# Altium PCB 3Wheel_MotorDrivers_Encoders.PcbDoc
Units mil, origin at the board's own origin, x right, y up, seen from the top; angles counter-clockwise.
Board outline 2760.61 x 2385 mil, 2 copper layers (Top Layer, Bottom Layer); 35 components, 40 nets, 155 pads, 68 vias.
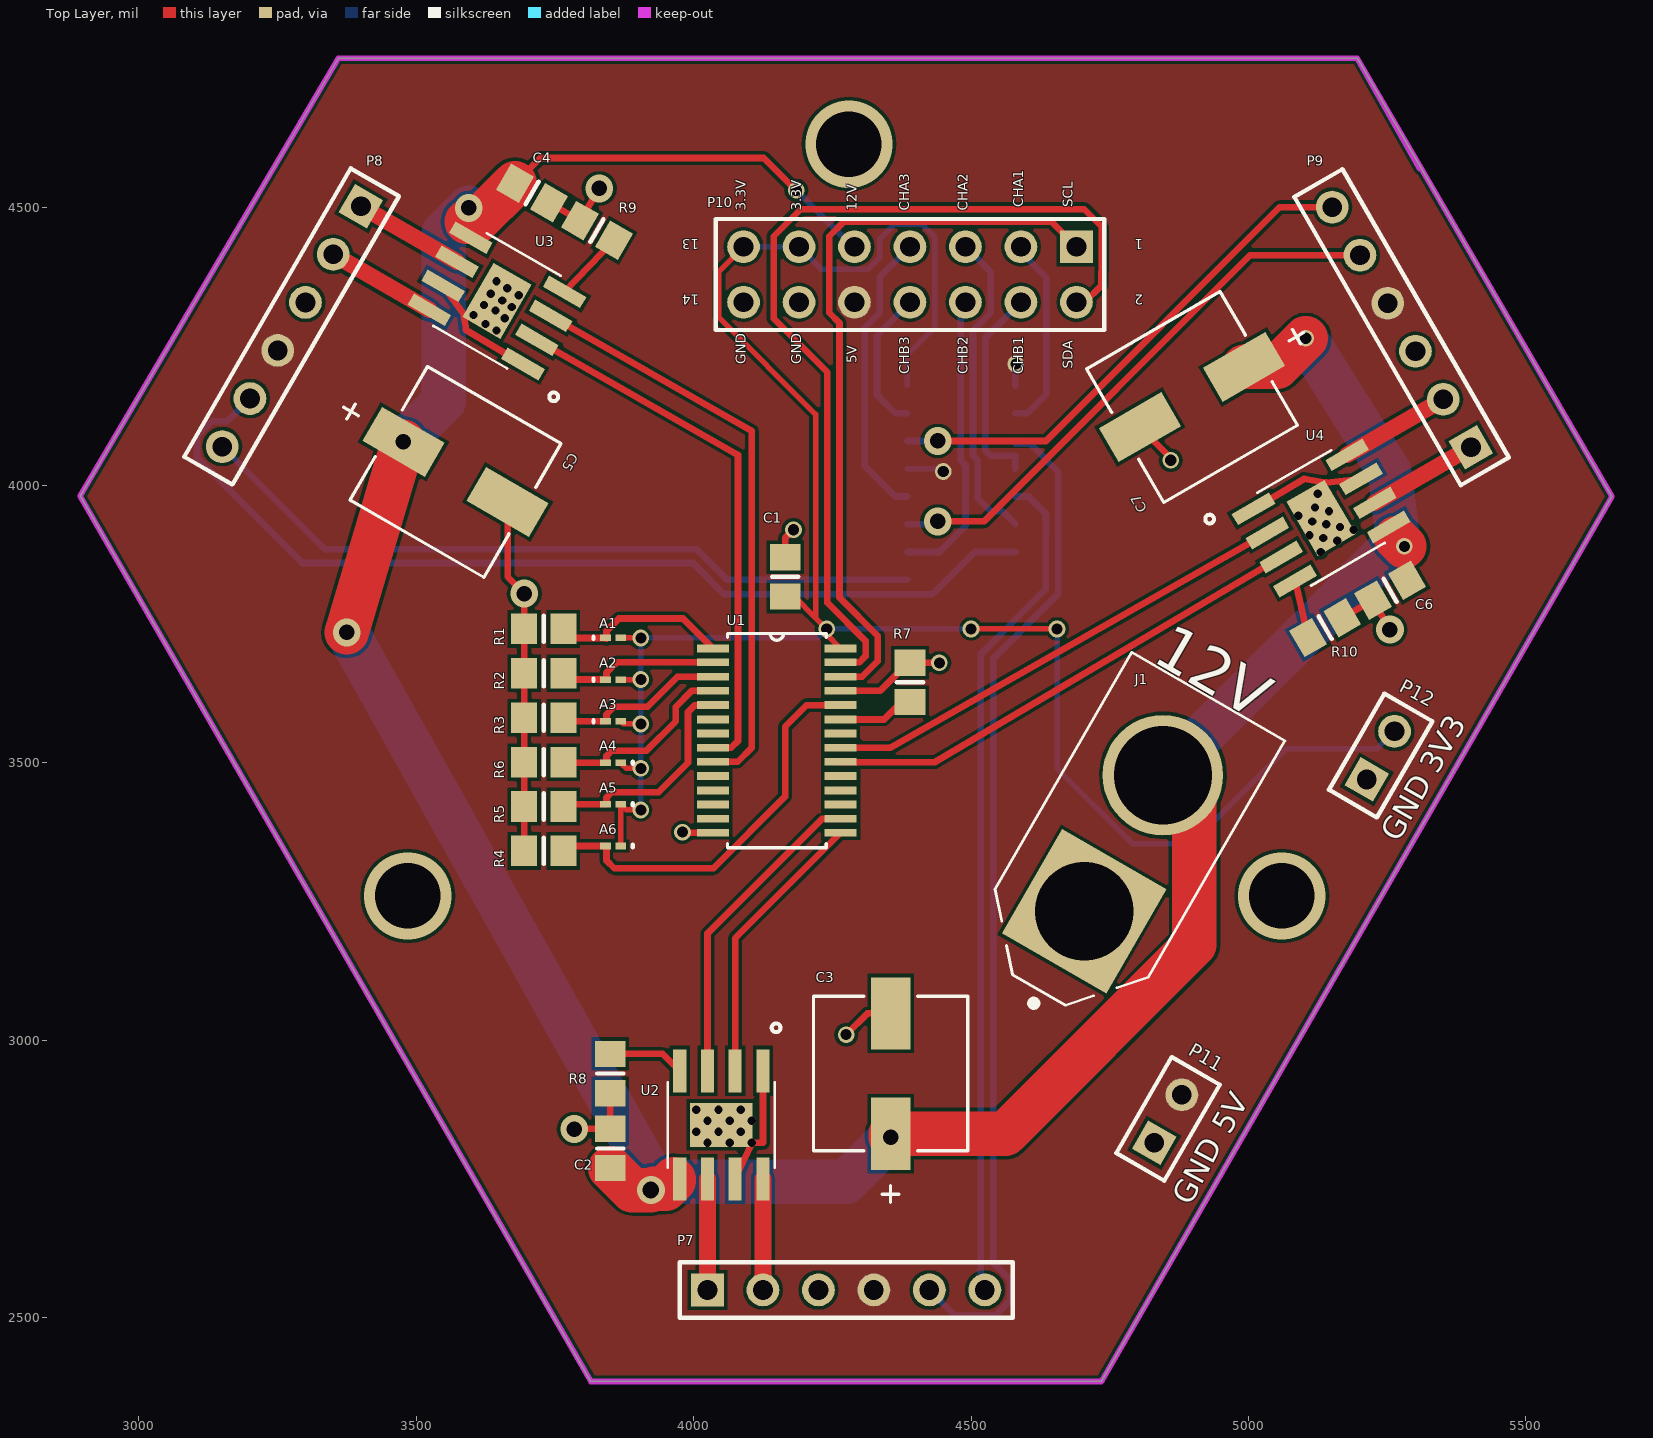
[diagram p0: Top Layer view]
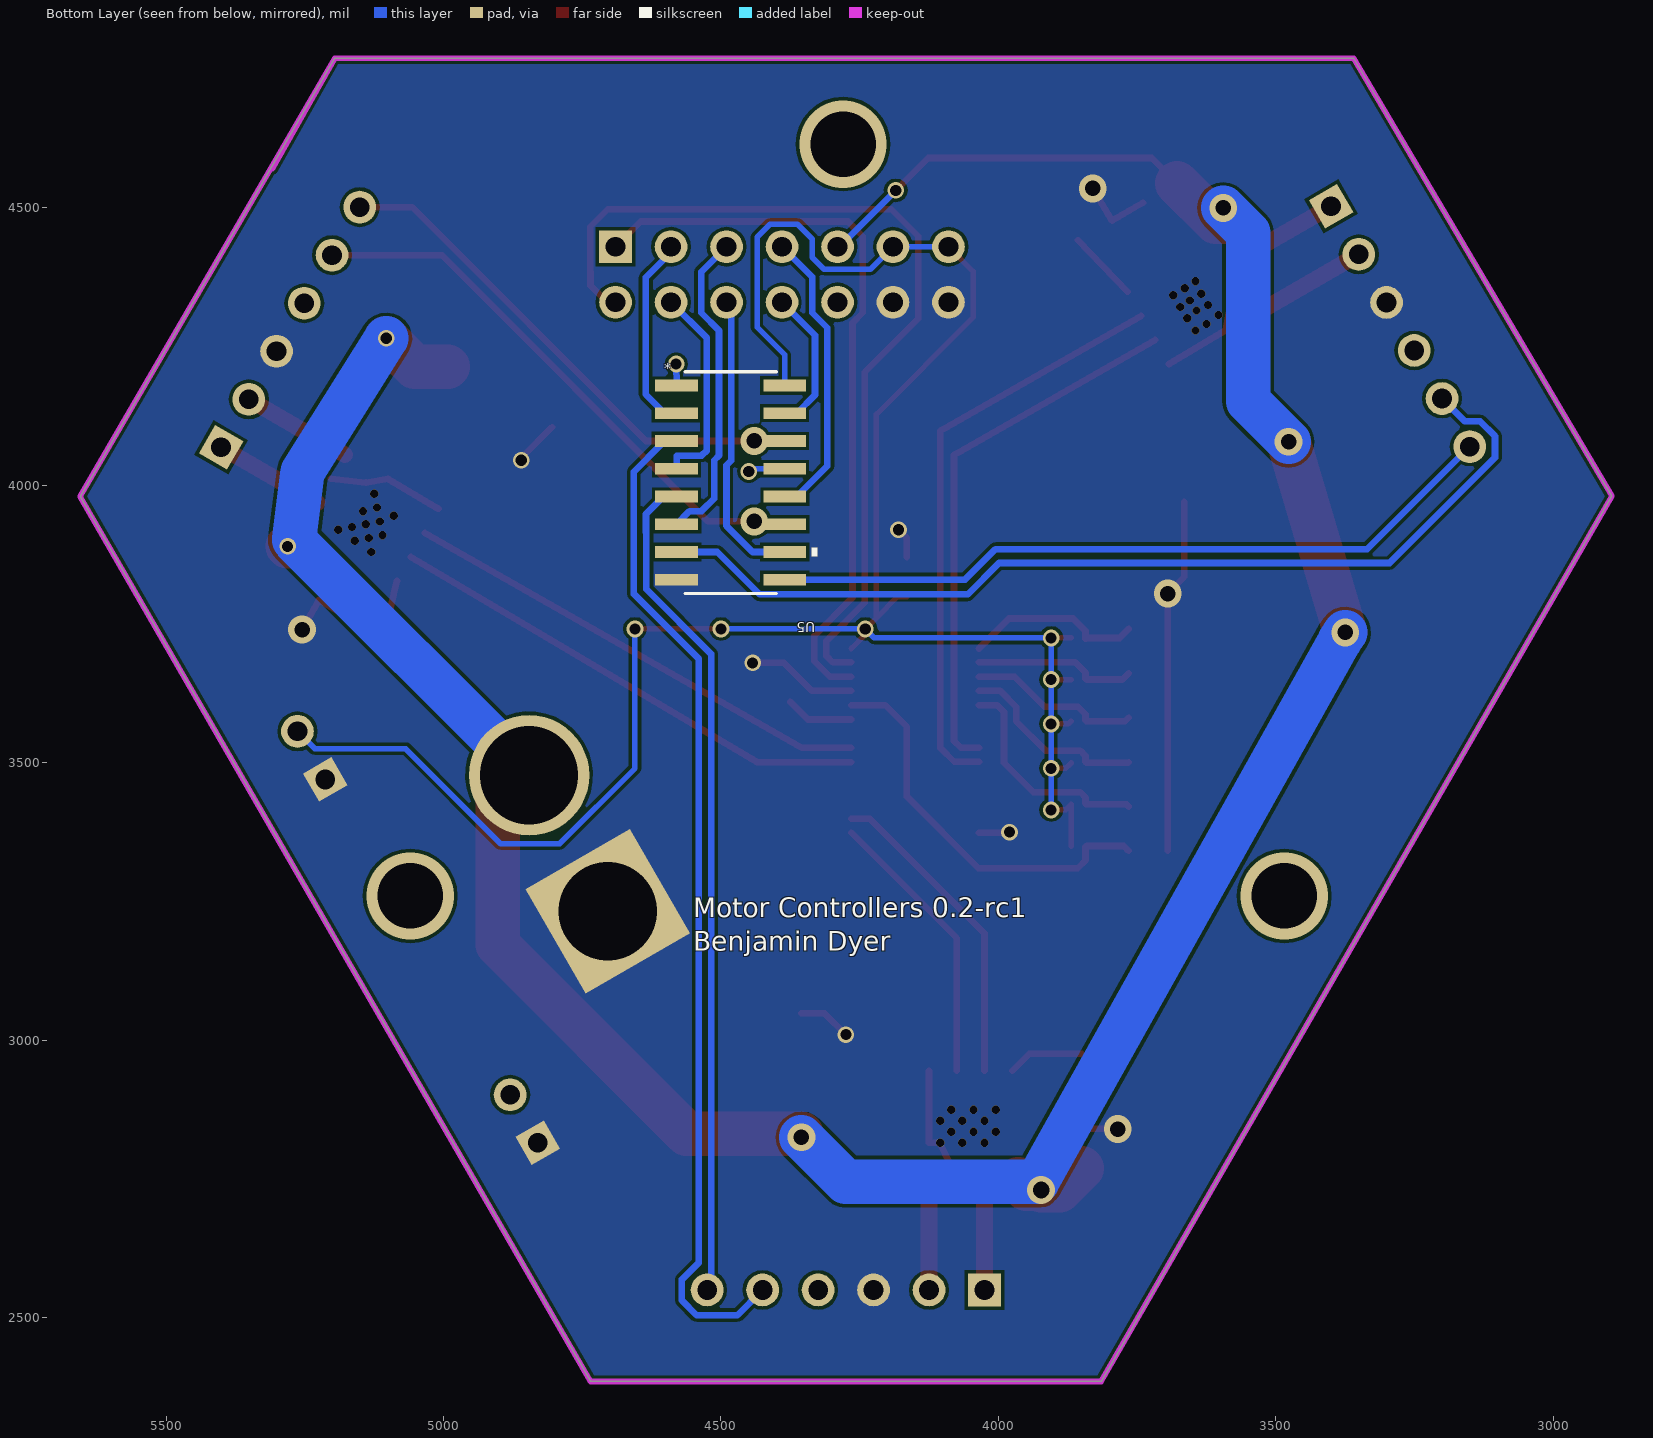
[diagram p1: Bottom Layer view, seen from below]

## Layer stack, top to bottom
Top Solder: solder mask 0.4, Solder Resist, Dk 3.5
Top Layer: signal copper 1.4
Dielectric 1: dielectric 12.6, FR-4, Dk 4.8
Bottom Layer: signal copper 1.4
Bottom Solder: solder mask 0.4, Solder Resist, Dk 3.5

## Board outline
3815,2385 2894.39,3980.73 3360,4770 5195.9,4770 5655,3980 4735,2385

## Design rules (kind name [scope] priority, off if disabled: settings)
Clearance [All] p1: gap=6 ignorepadtopadclearanceinfootprint=FALSE
ComponentClearance [All] p1: gap=0 collisioncheckmode=3 verticalgap=0 showdistances=FALSE
PolygonConnect [All] p1: connectstyle=Direct reliefconductorwidth=10 reliefentries=4 polygonreliefangle="90 Angle" airgapwidth=10
RoutingVias [All] p1: holewidth=15 width=25 viastyle="Through Hole" minholewidth=15 minwidth=15 maxholewidth=50 maxwidth=50
SolderMaskExpansion [All] p1: expansion=4
Width [All] p1: maxlimit=80 minlimit=6 preferedwidth=10 minimp=50.000000 maximp=50.000000 favimp=50.000000
29 further rules are at their usual default settings.

## Components (designator, comment, footprint, x,y, rotation, side; value= is the part's Value field where it differs from the comment)
A1 "Bridge" 0603 3855,3725 r0 top
A2 "Bridge" 0603 3855,3650 r0 top
A3 "Bridge" 0603 3855,3575 r0 top
A4 "Bridge" 0603 3855,3500 r180 top
A5 "Bridge" 0603 3855,3425 r180 top
A6 "Bridge" 0603 3855,3350 r180 top
C1 "Cap" 6-0805_N 4165,3835 r270 top value=10uF
C2 "0.1uF" 6-0805_N 3850,2805 r270 top
C3 "47uF" PCAP_6.3x7.7-ELE 4355,2940 r90 top value=Value
C4 "0.1uF" 6-0805_N 3708.89,4526.9 r150 top
C5 "47uF" PCAP_6.3x7.7-ELE 3571.04,4024.25 r330 top value=Value
C6 "0.1uF" 6-0805_N 5255.1,3810.99 r30 top
C7 "47uF" PCAP_6.3x7.7-ELE 4898.19,4159.18 r210 top value=Value
J1 "XT60-M" *AMASS_XT60-M 4775,3355 r60 top
P7 "Header 6" HDR1X6 4025,2550 r0 top
P8 "Header 6" HDR1X6 3400.55,4502.85 r240 top
P9 "Header 6" HDR1X6 5400.94,4068.39 r120 top
P10 "Header 7X2" HDR2X7 4690,4430 r180 top
P11 "Header 2" HDR1X2 4830,2815 r60 top
P12 "Header 2" HDR1X2 5213.2,3470 r60 top
R1 "10K" 6-0805_N 3730,3741.2 r0 top
R2 "10K" 6-0805_N 3730,3661.2 r0 top
R3 "10K" 6-0805_N 3730,3581.2 r0 top
R4 "10K" 6-0805_N 3730,3341.2 r0 top
R5 "10K" 6-0805_N 3730,3421.2 r0 top
R6 "10K" 6-0805_N 3730,3501.2 r0 top
R7 "Res1" 6-0805_N 4390,3645 r270 top value=10K
R8 "Res1" 6-0805_N 3850,2940 r90 top value=33K
R9 "Res1" 6-0805_N 3825.8,4459.4 r330 top value=33K
R10 "Res1" 6-0805_N 5138.19,3743.49 r210 top value=33K
U1 "PCA9685PW/Q900,118" *SOP65P640X110-28N 4150,3540 r0 top
U2 "DRV8871DDAR" *SOIC127P600X170-8N 4050,2847.44 r270 top
U3 "DRV8871DDAR" *SOIC127P600X170-8N 3645.64,4332.48 r150 top
U4 "DRV8871DDAR" *SOIC127P600X170-8N 5130.84,3941.32 r30 top
U5 "Part Number: MC14504BDR2G" SOIC-16 4482.5,4005 r180 bottom value=Value

## Footprints (in the part's own frame and the unit in brackets; to place one, negate y for a bottom-side part, rotate by r counter-clockwise, add the part's x,y. Pads: shape width x height; smd on the part's side, far side on the other; paste and mask are expansions set on the pad)
6-0805_N [mm] "Chip Resistor, Body 2.0x1.2mm, IPC Medium Density"
  rect 1.2x1.4 smd: 1(-0.9,0) 2(0.9,0)
  silkscreen extent 0,-0.6 0,0.6, body extent -1.07,-0.7 1.07,0.7, height 0.7
0603 [mm] "Chip Inductor, Body 0.6x0.3mm, IPC High Density"
  rect 0.5x0.3 smd: 1(-0.35,0) 2(0.35,0)
  silkscreen extent -0.9,-0.05 -0.9,0.05, body extent -0.33,-0.18 0.33,0.18, height 0.55
*AMASS_XT60-M [mm]
  rect 5.516x5.516 hole 4.5: 1(-3.6,0)
  round 5.516 hole 4.5: 2(3.6,0)
  silkscreen extent -8.55,-4.05 7.75,4.05
*SOIC127P600X170-8N [mm]
  rect 1.97x0.6 smd: 1(-2.475,1.905) 2(-2.475,0.635) 3(-2.475,-0.635) 4(-2.475,-1.905) 5(2.475,-1.905) 6(2.475,-0.635) 7(2.475,0.635) 8(2.475,1.905)
  rect 2.02x2.87 smd: 9(0,0)
  silkscreen extent -4.64,-2.45 1.95,2.7
*SOP65P640X110-28N [mil]
  rect 58x14 smd: 1(-115,166) 2(-115,141) 3(-115,115) 4(-115,90) 5(-115,64) 6(-115,38) 7(-115,13) 8(-115,-13) 9(-115,-38) 10(-115,-64) 11(-115,-90) 12(-115,-115) 13(-115,-141) 14(-115,-166) 15(115,-166) 16(115,-141) 17(115,-115) 18(115,-90) 19(115,-64) 20(115,-38) 21(115,-13) 22(115,13) 23(115,38) 24(115,64) 25(115,90) 26(115,115) 27(115,141) 28(115,166)
  silkscreen extent -89,-193 89,193
HDR1X2 [mm] "Connector; Header; 2 Position"
  rect 1.5x1.5 hole 0.9: 1(0,0)
  round 1.5 hole 0.9: 2(2.54,0)
  silkscreen extent -1.27,-1.27 3.81,1.27
HDR1X6 [mm] "Connector; Header; 6 Position"
  rect 1.5x1.5 hole 0.9: 1(0,0)
  round 1.5 hole 0.9: 2(2.54,0) 3(5.08,0) 4(7.62,0) 5(10.16,0) 6(12.7,0)
  silkscreen extent -1.27,-1.27 13.97,1.27
HDR2X7 [mm] "Connector; Header; 7x2 Position"
  rect 1.5x1.5 hole 0.9: 1(0,0)
  round 1.5 hole 0.9: 2(0,2.54) 3(2.54,0) 4(2.54,2.54) 5(5.08,0) 6(5.08,2.54) 7(7.62,0) 8(7.62,2.54) 9(10.16,0) 10(10.16,2.54) 11(12.7,0) 12(12.7,2.54) 13(15.24,0) 14(15.24,2.54)
  silkscreen extent -1.27,-1.27 16.51,3.81
PCAP_6.3x7.7-ELE [mil]
  rect 130x71 smd paste+0 mask+0: 1(-108.5,0) 2(108.5,0)
  silkscreen extent -232,-139 139,139, body extent 0,0 10,10, height 10
SOIC-16 [mil]
  rect 77x21 smd: 1(-97.5,175) 2(-97.5,125) 3(-97.5,75) 4(-97.5,25) 5(-97.5,-25) 6(-97.5,-75) 7(-97.5,-125) 8(-97.5,-175) 9(97.5,-175) 10(97.5,-125) 11(97.5,-75) 12(97.5,-25) 13(97.5,25) 14(97.5,75) 15(97.5,125) 16(97.5,175)
  silkscreen extent -82,-200 156,200, body extent 0,0 10,10, height 10

## Part data
A1 A2 A3 A4 A5 A6: library part "Header 2", "Header, 2-Pin", LatestRevisionDate=17-Jul-2002, LatestRevisionNote="Re-released for DXP Platform.", Publisher="Altium Limited"
C1: "Capacitor", LatestRevisionDate=17-Jul-2002, LatestRevisionNote="Re-released for DXP Platform.", PackageDescription="Radial Cap, Thru-Hole; 2 Leads; 0.3 in Pin Spacing", PackageReference=RAD-0.3, Published=8-Jun-2000, Publisher="Altium Limited"
C2 C4 C6: library part Cap, "Capacitor", LatestRevisionDate=17-Jul-2002, LatestRevisionNote="Re-released for DXP Platform.", PackageDescription="Radial Cap, Thru-Hole; 2 Leads; 0.3 in Pin Spacing", PackageReference=RAD-0.3, Published=8-Jun-2000, Publisher="Altium Limited"
C3 C5 C7: library part UWT1H470MCL1GS, "No Description Available", Built_By=EMA_UL_Team, Copyright="Copyright (C) 2018 Accelerated Designs. All rights reserved", Manufacturer_Part_Number=UWT1H470MCL1GS, RefDes=RefDes, Type=DEV, Vendor=Nichicon
J1: "Plug; DC supply; XT60; male; PIN: 2; for cable; soldered; 30A; 500V", Package="Package Analog Devices", Availability=Unavailable, MF=AMASS, MP=XT60-M, Price=None, SnapEDA_Link=https://www.snapeda.com/parts/XT60-M/AMASS/view-part/2883912/?ref=snap
P7 P8 P9: "Header, 6-Pin", LatestRevisionDate=17-Jul-2002, LatestRevisionNote="Re-released for DXP Platform.", Publisher="Altium Limited"
P10: "Header, 7-Pin, Dual row", LatestRevisionDate=17-Jul-2002, LatestRevisionNote="Re-released for DXP Platform.", Publisher="Altium Limited"
P11 P12: "Header, 2-Pin", LatestRevisionDate=17-Jul-2002, LatestRevisionNote="Re-released for DXP Platform.", Publisher="Altium Limited"
R1 R2 R3 R4 R5 R6: library part Res1, "Resistor", LatestRevisionDate=17-Jul-2002, LatestRevisionNote="Re-released for DXP Platform.", PackageDescription="Axial Device, Thru-Hole; 2 Leads; 0.3 in Pin Spacing", PackageReference=AXIAL-0.3, Published=8-Jun-2000, Publisher="Altium Limited"
R7 R8 R9 R10: "Resistor", LatestRevisionDate=17-Jul-2002, LatestRevisionNote="Re-released for DXP Platform.", PackageDescription="Axial Device, Thru-Hole; 2 Leads; 0.3 in Pin Spacing", PackageReference=AXIAL-0.3, Published=8-Jun-2000, Publisher="Altium Limited"
U1: "LED Driver IC 16 Output Linear PWM Dimming 25mA 28-TSSOP", Package="TSSOP-28 NXP Semiconductors", Digi-Key_Part_Number=568-5931-1-ND, Digi-Key_Purchase_URL=https://www.digikey.com/product-detail/en/nxp-usa-inc/PCA9685PW-Q900,118/568-5931-1-ND/2531218?utm_source=snapeda&utm_medium=aggregator&utm_campaign=symbol, MF="NXP USA", MP=PCA9685PW/Q900,118, SnapEDA_Link=https://www.snapeda.com/parts/PCA9685PW/Q900%2C118/NXP%20USA%20Inc./view-part/380795/?ref=snap
U2 U3 U4: "Unipolar Motor Driver NMOS PWM 8-SO PowerPad", Package="SO-8 Texas Instruments", Digi-Key_Part_Number=296-43024-1-ND, Digi-Key_Purchase_URL=https://www.digikey.com/product-detail/en/texas-instruments/DRV8871DDAR/296-43024-1-ND/5722182?utm_source=snapeda&utm_medium=aggregator&utm_campaign=symbol, MF="Texas Instruments", MP=DRV8871DDAR, SnapEDA_Link=https://www.snapeda.com/parts/DRV8871DDAR/Texas%20Instruments/view-part/492651/?ref=snap
U5: library part MC14504BDR2G, "No Description Available", Copyright="Copyright (C) 2016 Accelerated Designs. All rights reserved", Manufacturer_Part_Number=MC14504BDR2G, RefDes=RefDes, Type=DEV, Vendor="ON Semiconductor"

## Via types
v1: diameter 15, hole 15, Top Layer to Bottom Layer, tented both sides, 36 vias
v2: diameter 30, hole 20, Top Layer to Bottom Layer, tented both sides, 18 vias
v3: diameter 50, hole 28, Top Layer to Bottom Layer, tented both sides, 10 vias
v4: diameter 157.48, hole 118.11, Top Layer to Bottom Layer, 3 vias
v5: diameter 50, hole 30, Top Layer to Bottom Layer, tented both sides, 1 vias

## Nets (pads, with @x,y where several pads share a name; then routed paths per layer and width w, separated by ;. In a path a pad name is that pad's centre, name@x,y a point inside that pad or via, vN(x,y) a via of type N, cw(c..) or ccw(c..) an arc to the next point about the centre after c; other vN are vias at no path point)
3V3: A1.2 A2.2 A3.2 A4.1 A5.1 A6.1 C1.2 P10.11 P10.13 P12.2 U1.28 U5.16 | length 3949
  Top Layer w10: A6.1 A5.1 3878.78,3415 v2(3905,3415) ; A4.1 3878.78,3490 v2(3905,3490) ; A3.2 3873.78,3570 v2(3905,3570) ; A2.2 v2(3905,3650) ; A1.2 v2(3905,3725) ; P10.13 4045.47,4385.47 4045.47,4302.53 4220,4128 4220,3761.2 ; C1.2 4181.64,3799.57 4220,3761.2 ; U1.28 4240,3731 v2(4240,3741.2) 4220,3761.2 ; v2(4500,3741.2) v2(4655,3741.2)
  Bottom Layer w10: v2(3905,3415) v2(3905,3490) v2(3905,3570) v2(3905,3650) v2(3905,3725) 4223.8,3725 v2(4240,3741.2) v2(4500,3741.2) ; P10.13 P10.11 4230.53,4389.47 4314.09,4389.47 4335.53,4410.91 4335.53,4443.58 4362.47,4470.53 4411.61,4470.53 4435,4447.14 4435,4285 4385,4235 U5.16 ; v2(4655,3741.2) 4655,3490 4790.84,3354.16 4897.06,3354.16 5068.23,3525.34 5231.93,3525.34 P12.2
3V3CHA1: P10.3 U5.2 | length 354.5
  Bottom Layer w12: U5.2 4601.63,4130 4635.53,4163.9 4635.53,4374.47 4590,4420 P10.3
3V3CHA2: P10.5 U5.6 | length 576.5
  Bottom Layer w12: P10.5 4535.53,4384.47 4535.53,4311.14 4503.5,4279.11 4503.5,4053.76 4512,4045.26 4512,3976.37 4534.87,3953.5 4556.5,3953.5 U5.6
3V3CHA3: P10.7 U5.12 | length 528.1
  Bottom Layer w12: U5.12 4363.37,3980 4308.5,4034.87 4308.5,4284.11 4335.53,4311.14 4335.53,4375.53 P10.7
3V3CHB1: P10.4 U5.4 | length 375.7
  Bottom Layer w12: U5.4 4580,4053.5 4534.87,4053.5 4525.5,4062.87 4525.5,4265.5 P10.4
3V3CHB2: P10.6 U5.10 | length 534.5
  Bottom Layer w12: U5.10 4442.98,3880 4490,3927.02 4490,4036.15 4481.5,4044.65 4481.5,4321.5 P10.6
3V3CHB3: P10.8 U5.15 | length 259.9
  Bottom Layer w12: U5.15 4363.37,4130 4330.5,4162.87 4330.5,4270.5 P10.8
5V: P7.4 P8.4 P9.4 P10.10 P11.2 U5.1 U5.13 | length 105.7
  Bottom Layer w10: U5.13 4445,4030 v2(4450,4025)
  Bottom Layer w12: U5.1 v2(4580.73,4218.61)
5VCHA1: P7.5 U5.3 | length 1832.8
  Bottom Layer w12: P7.5 4470.53,2504.47 4543.86,2504.47 4570.53,2531.14 4570.53,2568.86 4539.81,2599.58 4539.81,3687.07 4657,3804.26 4657,4024.63 4606.13,4075.5 4580,4075.5 U5.3
5VCHA2: P8.5 U5.7 | length 1771.1
  Bottom Layer w12: P8.5 3159.48,4115.36 3131.69,4115.36 3105.02,4088.69 3105.02,4049.98 3295,3860 3998.89,3860 4055.39,3803.5 4430.13,3803.5 4506.63,3880 U5.7
5VCHA3: P9.5 U5.11 | length 1016.7
  Top Layer w12: v3(4440,3935) 4523.5,3935 5003.3,4414.8 P9.5
  Bottom Layer w12: U5.11 4435,3930 v3(4440,3935)
5VCHB1: P7.6 U5.5 | length 1518.1
  Bottom Layer w12: P7.6 4517.81,2557.19 4517.81,3696.18 4634.5,3812.87 4634.5,3914.5 4635,3915 4635,3948.5 4603.5,3980 U5.5
5VCHB2: P8.6 U5.9 | length 1333.8
  Bottom Layer w12: P8.6 3335.38,3885 4005,3885 4060,3830 U5.9
5VCHB3: P9.6 U5.14 | length 940.5
  Top Layer w12: v3(4440,4080) 4635,4080 5056.4,4501.4 P9.6
  Bottom Layer w12: U5.14 v3(4440,4080)
12V: C2.2 C3.1 C4.2 C5.1 C6.2 C7.1 J1.2 P10.9 U2.5 U3.5 U4.5 | length 5575.4
  Top Layer w12: C4.2 3723.58,4590 4126.49,4590 v2(4185,4531.49)
  Top Layer w80: v3(3375,3735) v3(3477.07,4078.5) ; 3590.74,4475 3608.58,4475 C4.2 ; C2.2 3889.57,2730 v5(3923.13,2730) 3928.6,2732.49 3949.67,2732.49 3964,2746.81 U2.5@3964,2750 ; v3(4355,2825) C3.1 4562.16,2831.5 4902.46,3171.8 4902.46,3447.54 4872.26,3477.74 J1.2 ; C7.1 5051.6,4213.43 v2(5103.17,4265) ; 5266.13,3904.87 v2(5281,3890)
  Bottom Layer w12: v2(4185,4531.49) 4286.49,4430 P10.9
  Bottom Layer w80: v3(3375,3735) 3385,3720 3930,2745 4275,2745 v3(4355,2825) ; v3(3477.07,4078.5) 3550.02,4151.44 3550.02,4455.02 v3(3595,4500) ; J1.2 5269.56,3901.44 5253.92,4024.8 v2(5103.17,4265)
A0: A1.1 R1.2 U1.1 | length 322.9
  Top Layer w12: R1.2 3781.64,3725 A1.1 3842.94,3723.28 3842.94,3737.53 3865.4,3760 3981,3760 U1.1
A1: A2.1 R2.2 U1.2 | length 293.4
  Top Layer w12: R2.2 3776.64,3650 A2.1 3842.94,3651.72 3842.94,3662.53 3861.4,3681 U1.2
A2: A3.1 R3.2 U1.3 | length 311.6
  Top Layer w12: R3.2 3771.64,3575 A3.1 3842.94,3576.72 3842.94,3587.53 3856.4,3601 3917,3601 3971,3655 U1.3
A3: A4.2 R6.2 U1.4 | length 345.6
  Top Layer w12: R6.2 3766.64,3500 A4.2 3842.94,3501.72 3842.94,3512.53 3852.31,3521.91 3915.3,3521.91 3968,3574.6 3968,3600.74 3997.26,3630 U1.4
A4: A5.2 R5.2 U1.5 | length 405.3
  Top Layer w12: R5.2 3769.23,3425 A5.2 3842.94,3426.72 3842.94,3437.53 3852.31,3446.91 3936.91,3446.91 3990,3500 3990,3591.63 4002.37,3604 U1.5
A5: A6.2 R4.2 U1.24 | length 729.6
  Top Layer w12: R4.2 3774.23,3350 A6.2 3842.94,3348.28 3842.94,3324.05 3856.99,3310 4036,3310 4165,3439 4165,3565 4204,3604 U1.24
GND: C1.1 C2.1 C3.2 C4.1 C5.2 C6.1 C7.2 J1.1 P7.3 P8.3 P9.3 P10.12 P10.14 P11.1 P12.1 R1.1 R2.1 R3.1 R4.1 R5.1 R6.1 R7.1 R8.1 R9.1 R10.1 U1.14 U1.25 U2.1 U2.7 U2.9 U3.1 U3.7 U3.9 U4.1 U4.7 U4.9 U5.8 | length 2158.8
  Top Layer w12: U3.7 3585,4310 3590,4280 U3.1 ; C5.2 3665,3835 v3(3695,3805) 3694.94,3741.2 3694.87,3661.2 3694.79,3581.2 3694.72,3501.2 R5.1 R4.1 ; C4.1 R9.1 v3(3830,4535) ; v3(3785,2840) C2.1 R8.1 ; v2(3980,3375) 3981,3374 U1.14 ; U2.7 v1(4105,2815) 4125,2815 U2.1 ; C1.1 4165,3905 v2(4180,3920) ; U1.25 4336.62,3630 4387.06,3680.43 R7.1 4442.55,3680.43 v2(4442.98,3680) ; v2(4275,3010) 4313.5,3048.5 C3.2 ; C7.2 4860,4049.15 v2(4860,4045.26) ; U4.1 5100,4011.69 5140,4005 U4.7 ; R10.1 C6.1 v3(5255,3740)
  other v1: 4025,2815 4065,2815 4005,2835 4045,2835 4085,2835 4025,2855 4065,2855 4105,2855 4005,2875 4045,2875 4085,2875 5130,3880 5160,3900 5135,3905 5110,3910 5190,3920 5165,3925 5140,3930 5115,3935 5090,3945 5145,3953.5 5120,3960 5125,3985 3645,4279.11 3625,4290.79 3660,4301.13 3603.52,4306.83 3643.17,4315 3672.62,4321.5 3622.38,4325 3655,4333.17 3685,4342.38 3634.58,4345 3664.43,4355 3645,4367.62
M1+: P7.1 U2.6 | length 200
  Top Layer w30: P7.1 U2.6
M1-: P7.2 U2.8 | length 200
  Top Layer w30: P7.2 U2.8
M2+: P8.1 U3.6 | length 200
  Top Layer w30: P8.1 U3.6
M2-: P8.2 U3.8 | length 200
  Top Layer w30: P8.2 U3.8
M3+: P9.1 U4.6 | length 200
  Top Layer w30: U4.6 P9.1
M3-: P9.2 U4.8 | length 200
  Top Layer w30: U4.8 P9.2
NetR7_2: R7.2 U1.23 | length 123.1
  Top Layer w12: U1.23 4343.43,3578 R7.2@4375,3609.57
NetR8_2: R8.2 U2.4 | length 137.7
  Top Layer w12: R8.2 3944.45,2975.43 U2.4
NetR9_2: R9.2 U3.4 | length 128.7
  Top Layer w12: U3.4 R9.2
NetR10_2: R10.2 U4.4 | length 104.6
  Top Layer w12: U4.4 R10.2
PWM+1: U1.16 U2.3 | length 573.2
  Top Layer w12: U2.3 4025,3192.63 4231.37,3399 U1.16
PWM+2: U1.9 U3.3 | length 1068.6
  Top Layer w12: U3.3 4105,4097.86 4105,3527.51 4079.49,3502 U1.9
PWM+3: U1.20 U4.3 | length 895.3
  Top Layer w12: U1.20@4265,3501.13 4435,3501.2 ; 4435.02,3501.17 U4.3
PWM-1: U1.15 U2.2 | length 507.8
  Top Layer w12: U2.2 4075,3184 U1.15
PWM-2: U1.8 U3.2 | length 983.2
  Top Layer w12: U3.2 4080,4054.99 4080,3539.37 4067.63,3527 U1.8
PWM-3: U1.21 U4.2 | length 871.4
  Top Layer w12: U1.21 4355,3527.51 U4.2
SCL: P10.1 U1.26 | length 1356
  Top Layer w12: U1.26 4303.74,3655 4332,3683.26 4332,3728.74 4263,3797.74 4263,4292.61 4244.47,4311.14 4244.47,4448.86 4271.14,4475.53 4644.47,4475.53 P10.1
SDA: P10.2 U1.27 | length 1662.8
  Top Layer w12: U1.27 4298.63,3681 4310,3692.37 4310,3719.63 4241,3788.63 4241,4204 4144.47,4300.53 4144.47,4448.86 4193.14,4497.53 4704.15,4497.53 4735.53,4466.15 4735.53,4384.47 4735,4383.94 4735,4360 4705,4330 P10.2
pads on no net: U1.6 U1.7 U1.10 U1.11 U1.12 U1.13 U1.17 U1.18 U1.19 U1.22
copper on no net:
  other v4: 3485,3260 5060,3260 4280,4615

## Polygon pours and split planes (outlines as drawn)
GND on Bottom Layer "GND_pour" (solid, pour order 4): 3815,2385 2894.39,3980.73 3360,4770 5195.9,4770 5655,3980 4735,2385
5V on Top Layer "5V_pour" (solid, pour order 2): 3815,2385 2894.39,3980.73 3360,4770 5195.9,4770 5655,3980 4735,2385

## Keep-outs
Keep-Out Layer:
  lines w10: 5195.9,4770 3360,4770 2894.39,3980.73 3815,2385 4735,2385 5655,3980 5195.9,4770 ; 5195.9,4770 5308.55,4570.59 ; 5308.55,4570.59 5308.55,4570.59

## Silkscreen, mask and mechanical layers (free items; w line width, h text height)
Top Overlay:
  text "CHA1" at 4600,4501.4 h30 r90
  text "SCL" at 4690,4501.4 h30 r90
  text "3.3V" at 4100,4495 h30 r90
  text "3.3V" at 4200,4495 h30 r90
  text "12V" at 4300,4495 h30 r90
  text "CHA3" at 4395,4495 h30 r90
  text "CHA2" at 4500,4495 h30 r90
  text "5V" at 4300,4220 h30 r90
  text "GND" at 4100,4218.61 h30 r90
  text "GND" at 4200,4218.61 h30 r90
  text "SDA" at 4690,4210.06 h30 r90
  text "CHB3" at 4395,4200 h30 r90
  text "CHB2" at 4500,4200 h30 r90
  text "CHB1" at 4600,4200 h30 r90
  text "12V" at 4824.09,3685 h80 r329.87
  text "3V3" at 5340,3477.74 h40 r60.23
  text "GND" at 5270,3355 h40 r60.3
  text "5V" at 4965,2827.74 h40 r59.46
  text "GND" at 4895,2700 h40 r61.95
Bottom Overlay:
  text "Motor Controllers 0.2-rc1 / Benjamin Dyer" at 4550,3150 h60

## Text inside footprints (layer, text, board x,y; h text height)
C3: Mechanical 7 "0.268in/6.807mm" at 4734,2846.25 h30 r90; Mechanical 7 "0.102in/2.591mm" at 4634,2751.75 h30 r90; Mechanical 7 "0.268in/6.807mm" at 4367.5,2498.5 h30 r90; Mechanical 7 "0.291in/7.391mm" at 4101,2846.25 h30 r90; Mechanical 7 "0.031in/0.787mm" at 4367.5,3233.5 h30 r90; Mechanical 7 "Alternate 2 Padstyle: OX90Y60D30P" at 4994.5,2527.5 h30 r90; Mechanical 7 "Alternate 1 Padstyle: OX60Y90D30P" at 4894.5,2527.5 h30 r90; Mechanical 7 "Default Padstyle: RX130Y71D0T" at 4794.5,2577.5 h30 r90
C5: Mechanical 7 "0.268in/6.807mm" at 3300.35,3742.9 h30 r330; Mechanical 7 "0.102in/2.591mm" at 3268.51,3876.75 h30 r330; Mechanical 7 "0.268in/6.807mm" at 3182.44,4234.17 h30 r330; Mechanical 7 "0.291in/7.391mm" at 3616.85,4291.1 h30 r330; Mechanical 7 "0.031in/0.787mm" at 3818.96,3866.67 h30 r330; Mechanical 7 "Alternate 2 Padstyle: OX90Y60D30P" at 2894.05,3676.68 h30 r330; Mechanical 7 "Alternate 1 Padstyle: OX60Y90D30P" at 2944.05,3763.28 h30 r330; Mechanical 7 "Default Padstyle: RX130Y71D0T" at 3037.35,3824.88 h30 r330
C7: Mechanical 7 "0.268in/6.807mm" at 4789.88,4534.28 h30 r210; Mechanical 7 "0.102in/2.591mm" at 4921.72,4494.92 h30 r210; Mechanical 7 "0.268in/6.807mm" at 5274.29,4390.75 h30 r210; Mechanical 7 "0.291in/7.391mm" at 5106.38,3986.08 h30 r210; Mechanical 7 "0.031in/0.787mm" at 4637.76,4023.25 h30 r210; Mechanical 7 "Alternate 2 Padstyle: OX90Y60D30P" at 4935.67,4919.25 h30 r210; Mechanical 7 "Alternate 1 Padstyle: OX60Y90D30P" at 4985.67,4832.65 h30 r210; Mechanical 7 "Default Padstyle: RX130Y71D0T" at 4992.37,4721.05 h30 r210
P10: Top Overlay "2" at 4810,4350 h30 r180; Top Overlay "13" at 4010,4450 h30 r180; Top Overlay "1" at 4810,4450 h30 r180; Top Overlay "14" at 4010,4350 h30 r180
U5: Mechanical 7 "0.049in/1.245mm" at 4673.75,3690 h30; Mechanical 7 "0.05in/1.27mm" at 4862.5,4142.5 h30; Mechanical 7 "0.39in/9.906mm" at 4285.5,3992.5 h30; Mechanical 7 "0.244in/6.198mm" at 4576.25,4370 h30; Mechanical 7 "0.154in/3.912mm" at 4576.25,4295 h30; Mechanical 7 "Alt 2 Padstyle: OX90Y60D30P" at 4820,3310 h30; Mechanical 7 "Alt 1 Padstyle: OX60Y90D30P" at 4820,3370 h30; Mechanical 7 "Pin One Padstyle: RX77Y21D0T" at 4832.5,3550 h30; Mechanical 7 "Default Padstyle: RX77Y21D0T" at 4832.5,3610 h30; Mechanical 13 "*" at 4557,4147 h30; Bottom Overlay "*" at 4602.5,4196 h30